# EAGLE board pumpkin (EAGLE 5.09)
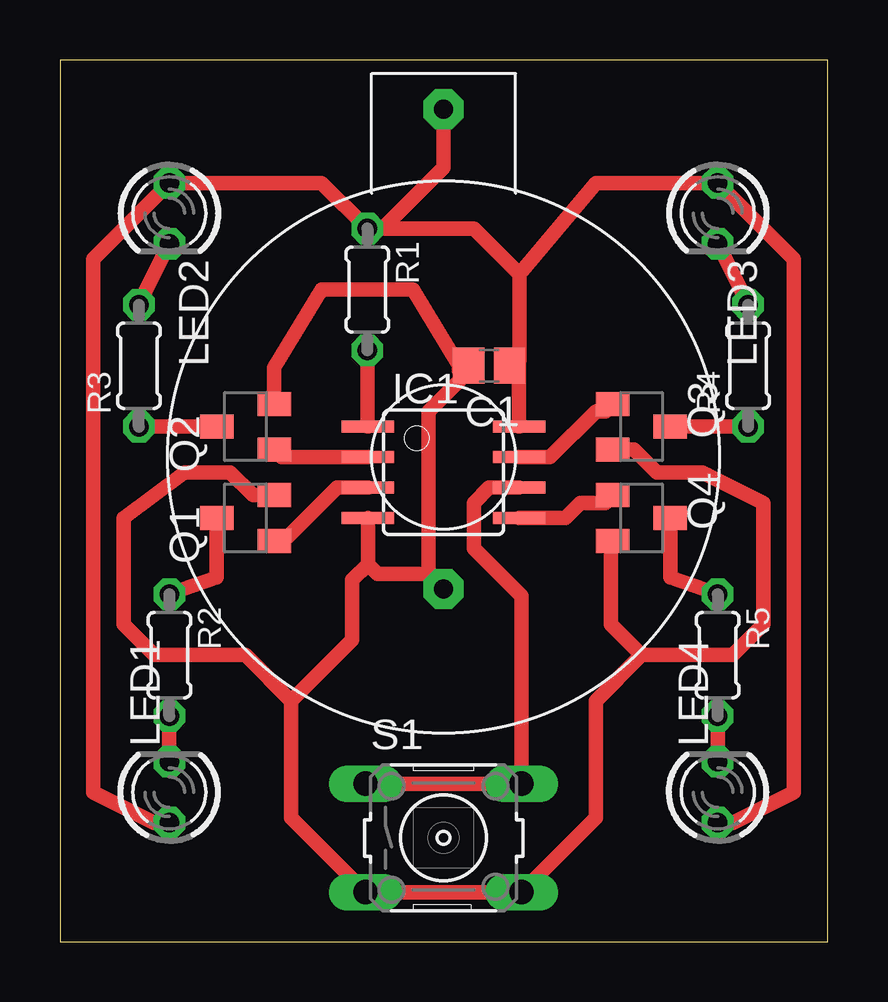
[diagram p0: board, top side]

Size 32 x 36.75 mm. Coordinates in mm from the lower left corner, seen from the top.
Outline: 0,0 32,0 32,36.75 0,36.75 0,0
Copper layers (1*16): Top 0.035mm / dielectric 1.5mm / Bottom 0.035mm
Design rules "default": minimum track width 10mil, minimum drill 24mil, track to track 8mil, track to pad 8mil, pad to pad 8mil, via to via 8mil, smd to smd 8mil, copper to edge 40mil, drill to drill 8mil, minimum pad ring 10mil, minimum via ring 8mil, stop-mask expansion 4mil, vias tented up to drill 0mil, thermal gap 10mil

## Footprints (pad centres in the part's own frame; a part is rotated, then mirrored left to right if it is on the bottom)
C2012 = smd 1.3 x 1.5: 1 -0.85,0; 2 0.85,0
SOIC8 = smd 0.5 x 2.2: 1 -1.905,-3.154; 2 -0.645,-3.154; 3 0.625,-3.154; 4 1.895,-3.154; 5 1.905,3.154; 6 0.635,3.154; 7 -0.635,3.154; 8 -1.905,3.154
LED3MM = drill 0.813 octagon: A -1.27,0; K 1.27,0
SC59-BEC = smd 1 x 1.4: B -0.95,-1.2; C 0,1.2; E 0.95,-1.2
0204/5 = drill 0.813 octagon: 1 -2.54,0; 2 2.54,0
B3F-10XX = drill 1.016 long: 1 -3.251,2.261; 2 3.251,2.261; 3 -3.251,-2.261; 4 3.251,-2.261
BH800 = drill 0.8 pad 1.676 octagon: + 0,-14.5; - 0,5.5

## Placement (x,y rotation side)
C1  104  [C2012]  17.9,24.01 180 top
IC1  ATTINY13-20S  [SOIC8]  15.99,19.56 270 top
LED1  [LED3MM]  4.56,6.23 90 top
LED2  [LED3MM]  4.56,30.35 270 top
LED3  [LED3MM]  27.42,30.35 270 top
LED4  [LED3MM]  27.42,6.23 90 top
Q1  MUN2213T1  [SC59-BEC]  7.73,17.66 90 top
Q2  MUN2213T1  [SC59-BEC]  7.73,21.47 90 top
Q3  MUN2213T1  [SC59-BEC]  24.24,21.47 270 top
Q4  MUN2213T1  [SC59-BEC]  24.24,17.66 270 top
R1  10k  [0204/5]  12.81,27.18 270 top
R2  50  [0204/5]  4.56,11.94 270 top
R3  50  [0204/5]  3.29,24.01 90 top
R4  50  [0204/5]  28.69,24.01 90 top
R5  50  [0204/5]  27.42,11.94 270 top
S1  [B3F-10XX]  15.99,4.32 0 top
U$1  BH800  [BH800]  15.99,20.2 180 top

## Library data of the parts
C1 = rcl
IC1 = avr
LED1-LED4 = led
Q1-Q4 = transistor-npn
R1-R5 = resistor
S1 = switch-omron
U$1 = daines_parts

## Nets
+5V: C1.1 IC1.8 LED1.A LED2.A LED3.A LED4.A R1.1 U$1.+
GND: C1.2 IC1.4 Q1.E Q2.E Q3.E Q4.E S1.3 S1.4 U$1.-
N$1: Q1.C R2.1
N$2: Q2.C R3.1
N$3: Q3.C R4.1
N$4: Q4.C R5.1
N$5: IC1.3 Q1.B
N$6: LED1.K R2.2
N$7: IC1.2 Q2.B
N$8: LED2.K R3.2
N$9: LED3.K R4.2
N$10: IC1.1 R1.2
N$11: LED4.K R5.2
N$12: IC1.7 Q3.B
N$13: IC1.5 Q4.B
N$14: IC1.6 S1.1 S1.2

## Tracks (layer width: path | path; a pad name or v marks a point on that pad's centre or on a via)
+5V
  Top 0.406: C1.1 19.14,23.37
  Top 0.61: 19.14,24.03 19.14,23.37 IC1.8 | LED4.A 28.05,4.95 30.59,6.23 30.59,28.45 LED3.A 22.34,31.62 19.16,27.81 | LED1.A 3.92,4.95 1.38,6.23 1.38,28.45 LED2.A 10.91,31.62 R1.1 13.45,29.72 | 13.45,29.72 17.26,29.72 19.16,27.81 | 19.16,27.81 19.16,24.22 C1.1 | U$1.+ 15.99,32.26 13.45,29.72
GND
  Top 0.61: Q4.E 22.98,16.63 22.98,13.21 24.24,11.94 | Q3.E 23.92,20.52 24.88,19.56 26.78,19.56 29.33,18.29 29.33,13.21 28.05,11.94 24.24,11.94 | 9.64,10.04 12.18,12.57 12.18,15.07 12.84,15.73 | 12.84,15.73 IC1.4 | 24.24,11.94 22.34,10.04 22.34,5.16 S1.4 S1.3 9.64,5.16 9.64,10.04 | Q1.E 8.05,18.6 7.1,19.56 5.2,19.56 2.66,17.66 2.66,13.21 3.92,11.94 7.73,11.94 9.64,10.04 | Q2.E 8.94,23.94 10.91,27.18 14.72,27.18 16.62,24.01 16.62,23.79 C1.2 16.62,23.37 15.35,22.1 15.35,15.33 | 15.35,15.33 U$1.- | 15.35,15.33 13.23,15.33 12.84,15.73
N$1
  Top 0.61: Q1.C 6.53,15.18 R2.1
N$2
  Top 0.61: R3.1 Q2.C
N$3
  Top 0.61: Q3.C R4.1
N$4
  Top 0.61: Q4.C 25.45,15.18 R5.1
N$5
  Top 0.61: Q1.B 9.33,16.7 11.55,18.92 12.83,18.92 IC1.3
N$6
  Top 0.61: LED1.K R2.2
N$7
  Top 0.61: IC1.2 9.24,20.2 Q2.B
N$8
  Top 0.61: R3.2 LED2.K
N$9
  Top 0.61: R4.2 LED3.K
N$10
  Top 0.61: IC1.1 12.81,21.49 R1.2
N$11
  Top 0.61: LED4.K R5.2
N$12
  Top 0.61: IC1.7 20.44,20.2 22.34,22.1 22.73,22.1 Q3.B
N$13
  Top 0.61: IC1.5 21.07,17.66 21.7,18.29 22.73,18.29 Q4.B
N$14
  Top 0.61: IC1.6 17.9,18.92 17.26,18.29 17.26,16.38 19.24,14.4 S1.2 S1.1